# Altium PCB PCB_Arduino Poudell Spot welder V1.0.pcbdoc
Units mm, origin at the board's own origin, x right, y up, seen from the top; angles counter-clockwise.
Board outline 215.93 x 113.17 mm, 4 copper layers (Top Layer, Inner1, Inner2, Bottom Layer); 63 components, 44 nets, 190 pads, 147 vias.
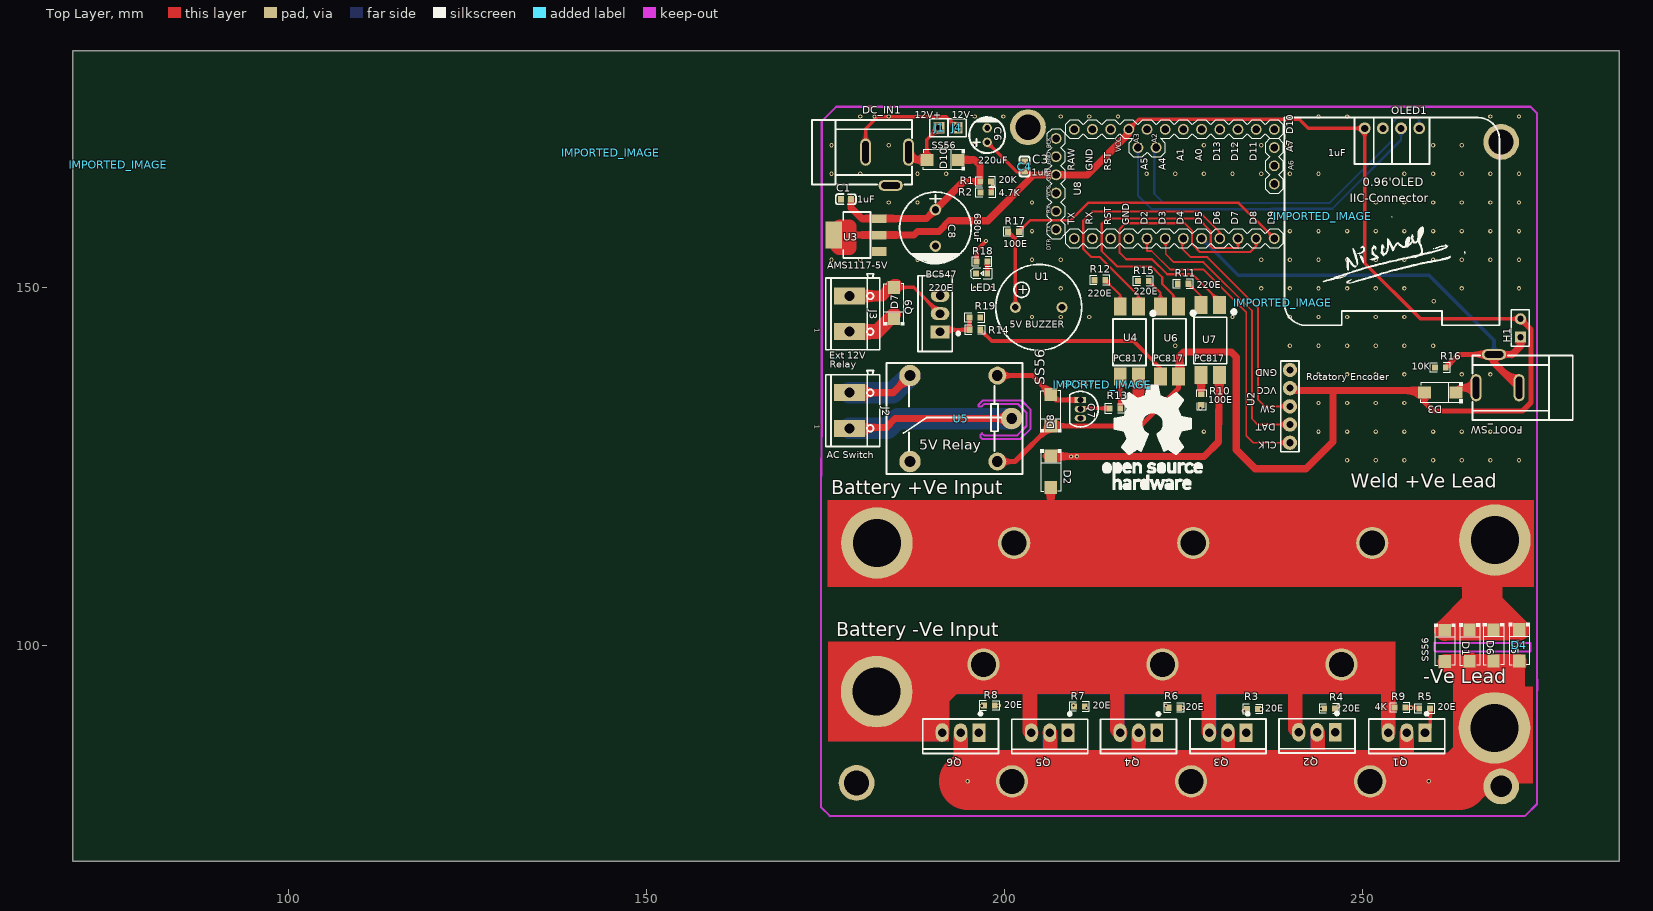
[diagram p0: Top Layer view]
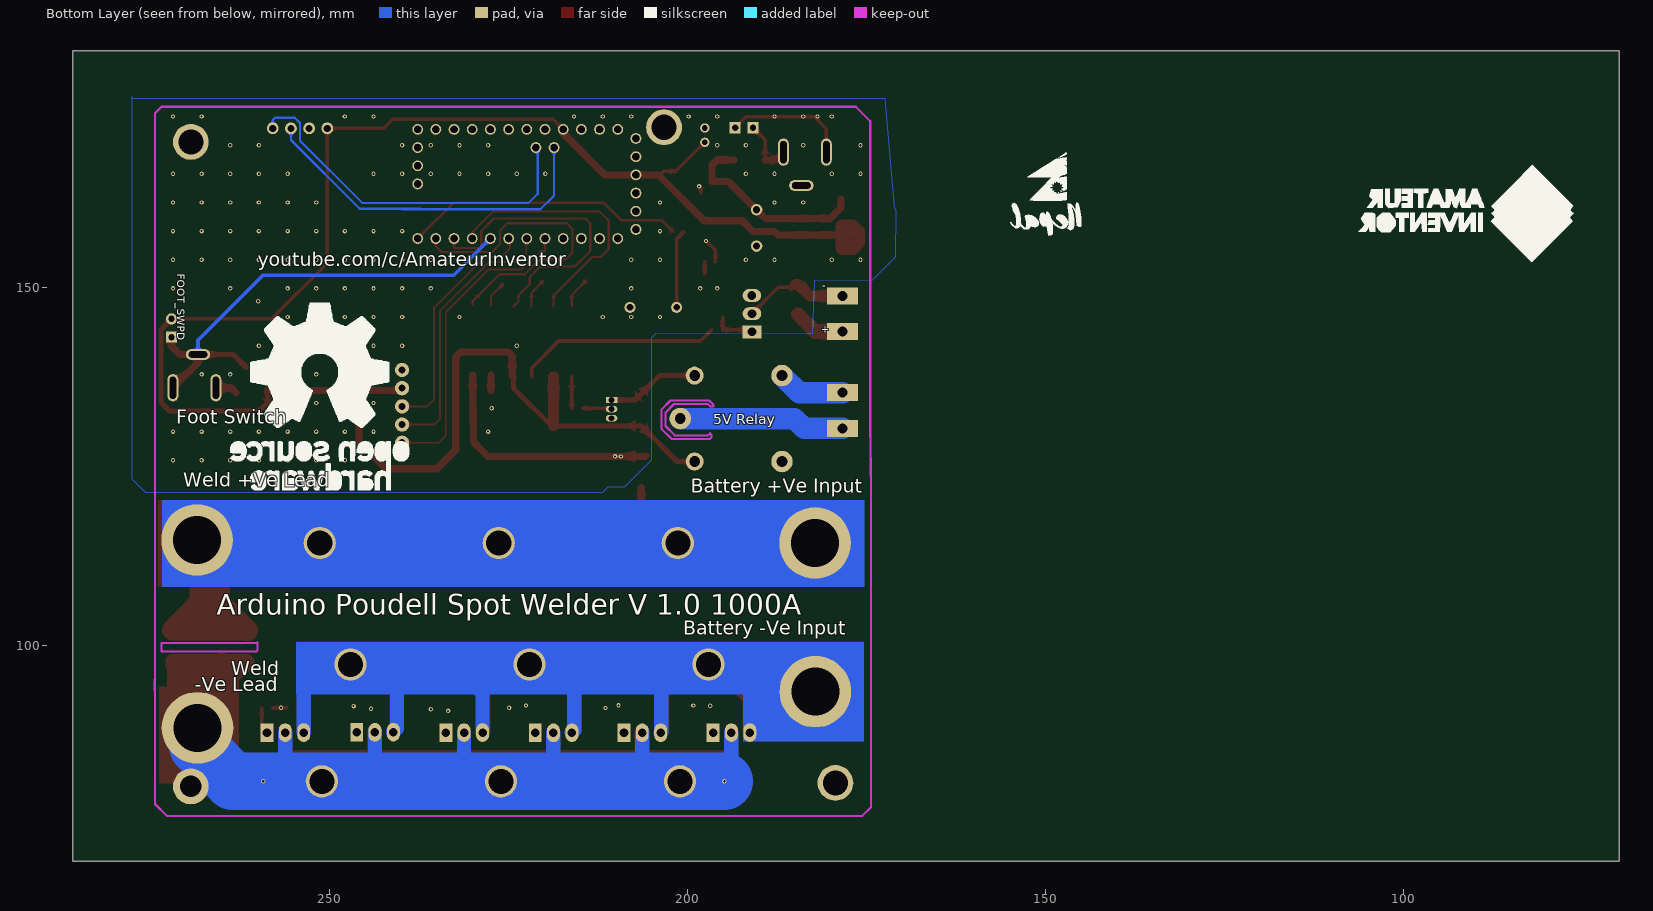
[diagram p1: Bottom Layer view, seen from below]
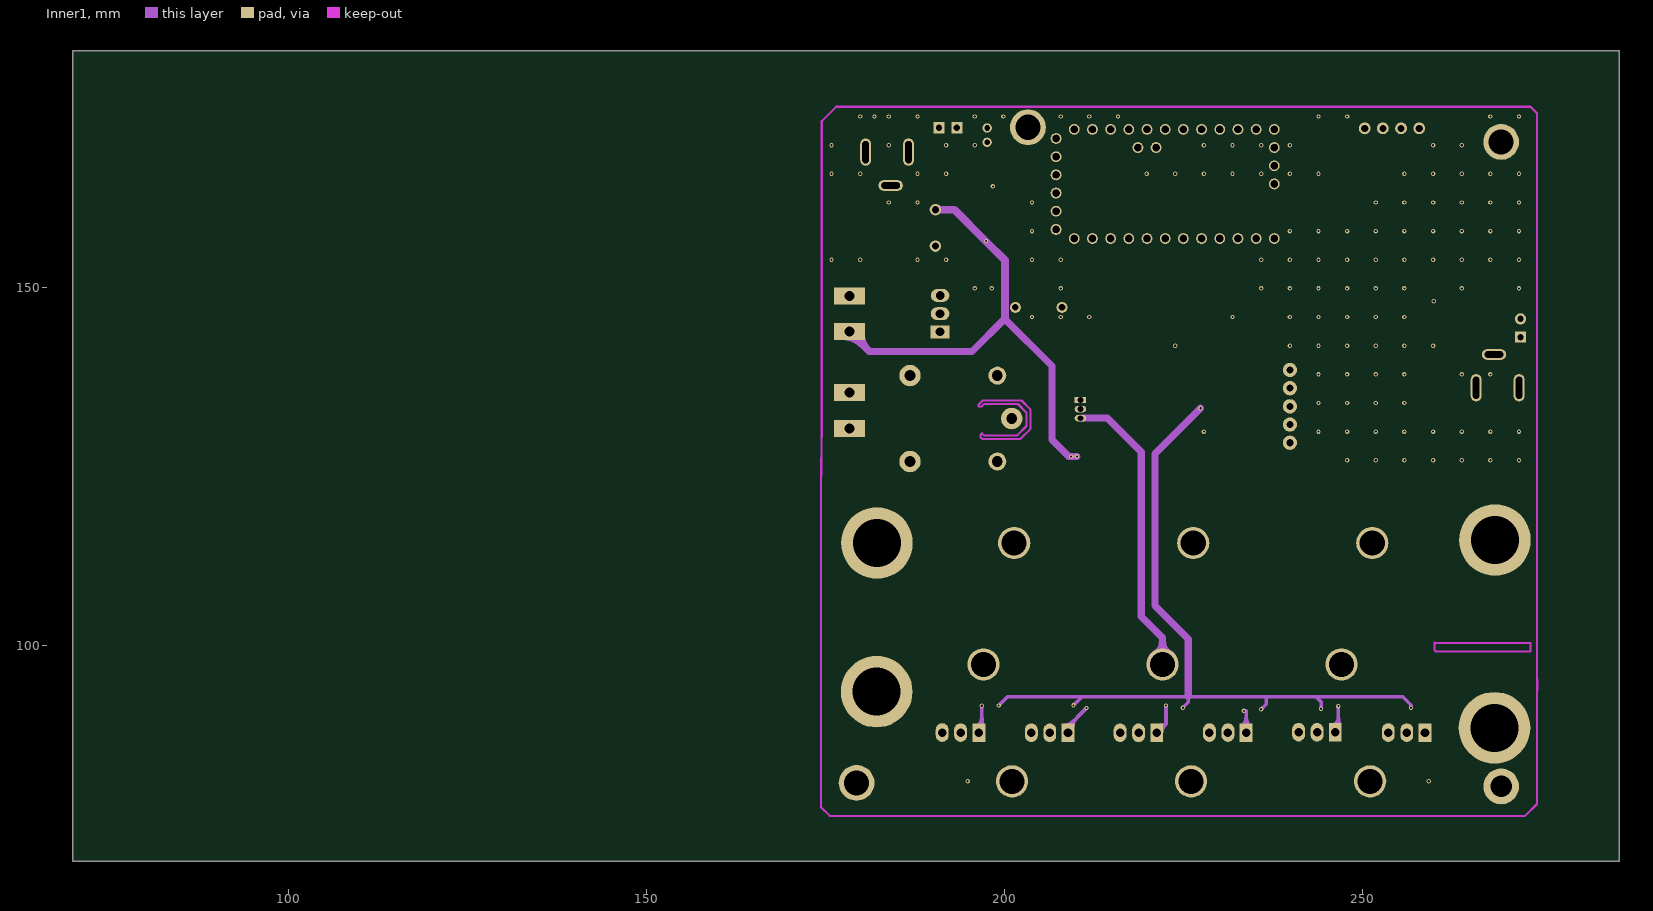
[diagram p2: Inner1]
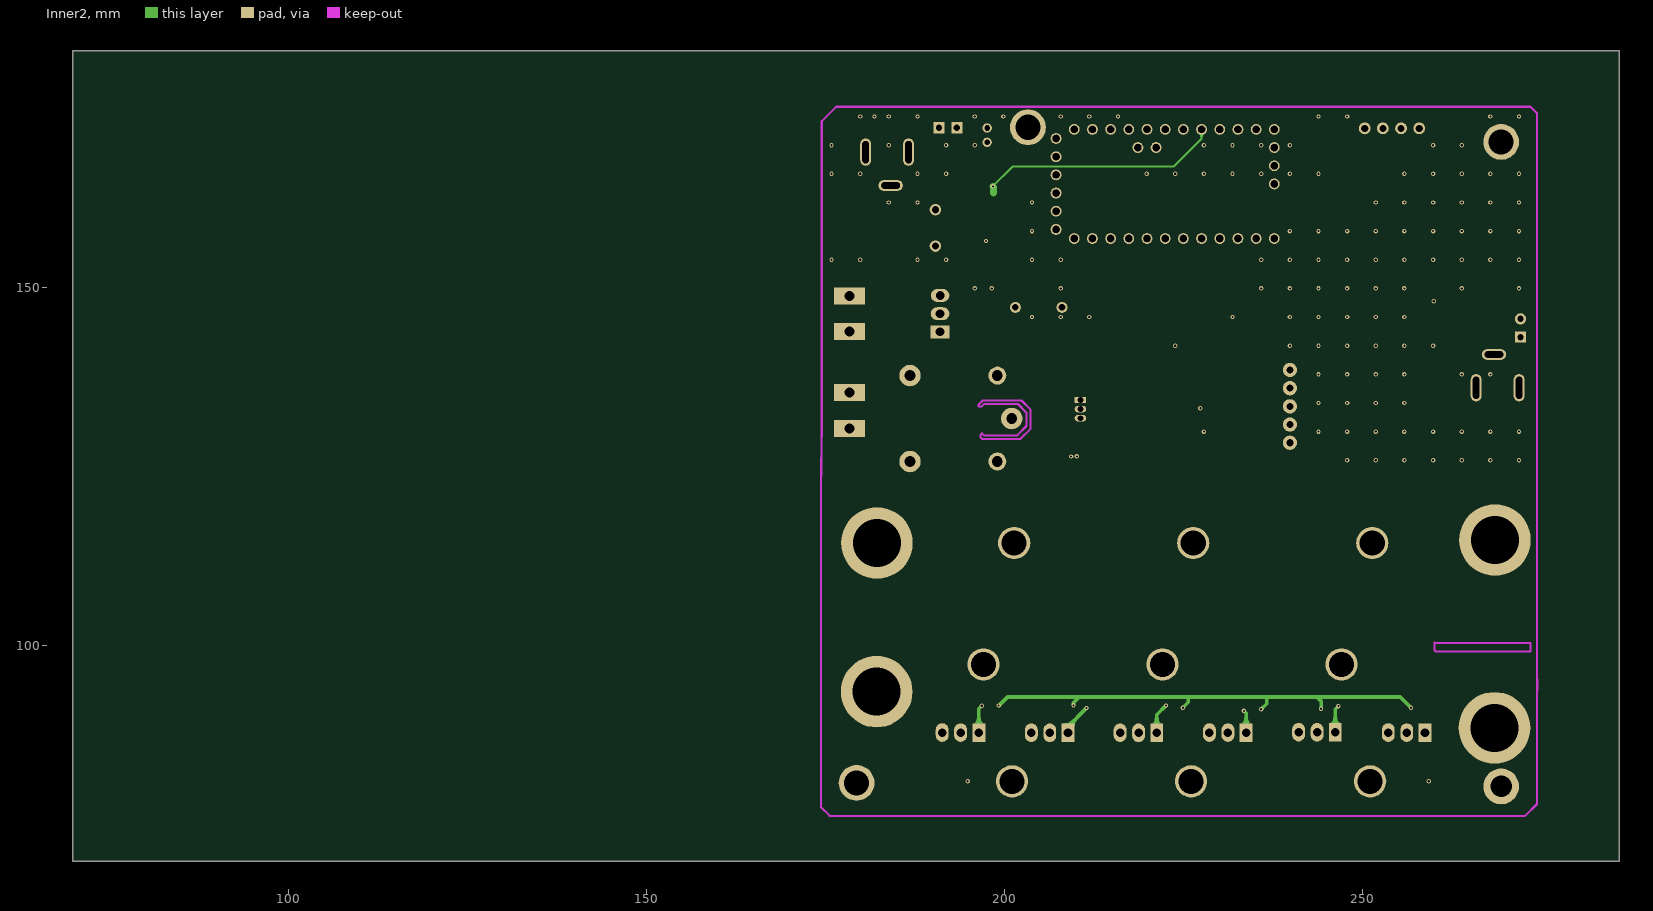
[diagram p3: Inner2]

## Layer stack, top to bottom
Top Layer: signal copper (thickness not stored)
Dielectric: dielectric 0.32, FR-4, Dk 4.8
Inner1: signal copper (thickness not stored)
Dielectric: dielectric 0.32, FR-4, Dk 4.8
Inner2: signal copper (thickness not stored)
Dielectric: dielectric 0.32, FR-4, Dk 4.8
Bottom Layer: signal copper (thickness not stored)

## Board outline
285.776,69.85 69.85,69.85 69.85,183.025 285.776,183.025

## Components (designator, comment, footprint, x,y, rotation, side; value= is the part's Value field where it differs from the comment)
C1 "1uF" footprint_bc1e 177.8,162.301 r0 top
C3 "1uF" footprint_bc1e 202.75,166.901 r270 top
C4 "1uF" footprint_bc1e 202.75,166.851 r270 top
C6 "10V 220uF" footprint_28fa 197.525,171.251 r90 top
C8 "35v 680uF" footprint_2c7b 190.3,158.301 r270 top
D1 "SS56" footprint_9b9f 261.425,99.926 r270 top
D2 "SS56" footprint_9b9f 206.4,124.251 r270 top
D3 "SS56" footprint_9b9f 260.8,135.301 r180 top
D4 "SS56" footprint_9b9f 271.825,100.026 r270 top
D5 "SS56" footprint_9b9f 268.225,100.001 r270 top
D6 "SS56" footprint_9b9f 264.9,99.976 r270 top
D7 "SS56" footprint_9b9f 184.5,147.801 r90 top
D8 "SS56" footprint_9b9f 206.4,132.851 r90 top
D10 "SS56" footprint_9b9f 191.3,167.801 r180 top
DC_IN1 "12.6V 2A" footprint_4f4c#1 183.549,166.551 r0 top
FOOT_SW "BarralJack" footprint_4f4c#2 268.8,138.301 r180 top
H1 "Foot_sw" footprint_42ee 271.998,144.325 r90 top
IMPORTED_IMAGE "IMPORTED_IMAGE" IMPORTED_IMAGE 76.2,167.084 r0 top
IMPORTED_IMAGE "IMPORTED_IMAGE" IMPORTED_IMAGE 144.953,168.803 r0 top
IMPORTED_IMAGE "IMPORTED_IMAGE" IMPORTED_IMAGE 244.388,159.899 r0 top
IMPORTED_IMAGE "IMPORTED_IMAGE" IMPORTED_IMAGE 238.8,147.828 r0 top
IMPORTED_IMAGE "IMPORTED_IMAGE" IMPORTED_IMAGE 213.625,136.376 r0 top
J1 "12V+" footprint_73cd 190.8,172.301 r0 top
J2 "EXT_AC" footprint_047e 178.3,132.801 r270 top
J3 "Ext Relay" footprint_047e 178.3,146.301 r270 top
J4 "12V-" footprint_73cd 193.3,172.301 r0 top
LED1 "Pwr_LED" footprint_213e 196.75,151.926 r0 top
OLED1 "0.96OLED_4P" footprint_7381 254.049,172.201 r0 top
Q1 "IRF540NPBF" footprint_fbe3 256.1,87.826 r180 top
Q2 "IRF540NPBF" footprint_fbe3 243.575,87.876 r180 top
Q3 "IRF540NPBF" footprint_fbe3 231.125,87.826 r180 top
Q4 "IRF540NPBF" footprint_fbe3 218.65,87.801 r180 top
Q5 "IRF540NPBF" footprint_fbe3 206.25,87.801 r180 top
Q6 "IRF540NPBF" footprint_fbe3 193.8,87.826 r180 top
Q7 "BC547B" footprint_6e3f 210.55,133.001 r270 top
Q9 "IRFZ44NPBF" footprint_beaa 190.95,146.326 r90 top
R1 "20k" footprint_e60d 197.299,164.8 r0 top
R2 "6.67k" footprint_e60d 197.35,163.226 r0 top
R3 "2E" footprint_e60d 234.574,91.1 r180 top
R4 "2E" footprint_e60d 245.326,91.201 r0 top
R5 "2E" footprint_e60d 258.625,91.201 r0 top
R6 "2E" footprint_e60d 223.599,91.3 r180 top
R7 "2E" footprint_e60d 210.408,91.476 r0 top
R8 "2E" footprint_e60d 197.825,91.6 r180 top
R9 "10k" footprint_e60d 255.173,91.351 r0 top
R10 "220E" footprint_e60d 227.424,134.325 r270 top
R11 "220E" footprint_e60d 224.899,150.5 r0 top
R12 "220E" footprint_e60d 213.274,151 r0 top
R13 "220E" footprint_e60d 215.35,133.101 r180 top
R14 "220E" footprint_e60d 195.8,144.076 r180 top
R15 "220E" footprint_e60d 219.324,150.901 r0 top
R16 "10k" footprint_e60d 260.799,138.801 r0 top
R17 "100E" footprint_e60d 201.201,157.775 r0 top
R18 "1K" footprint_e60d 196.8,153.601 r0 top
R19 "10k" footprint_e60d 195.8,145.801 r0 top
U1 "5V BUZZER" footprint_9d75 204.725,147.201 r0 top
U2 "Rotary Encoder" footprint_7133 239.8,128.301 r90 top
U3 "AMS1117-5.0_C498116" footprint_729b 179.3,157.301 r0 top
U4 "PC81713NIP1B" footprint_04e3 217.375,142.426 r180 top
U5 "5v" footprint_572f 193.85,131.676 r180 top
U6 "PC81713NIP1B" footprint_04e3 222.975,142.451 r180 top
U7 "PC81713NIP1B" footprint_04e3 228.675,142.651 r180 top
U8 "ARDUINO PRO MINI COPY" footprint_e3e4 218.575,160.626 r90 top

## Footprints (in the part's own frame and the unit in brackets; to place one, negate y for a bottom-side part, rotate by r counter-clockwise, add the part's x,y. Pads: shape width x height; smd on the part's side, far side on the other; paste and mask are expansions set on the pad)
footprint_2c7b [mm]
  round 1.6 hole 1: 1(-2.54,0) 2(2.54,0)
  silkscreen extent -5,-5 5.08,5
footprint_04e3 [mm]
  rect 1.8x2.5 smd: 1(-1.27,-4.9) 2(1.27,-4.9) 3(1.27,4.9) 4(-1.27,4.9)
  silkscreen extent -3.79,-4.42 2.29,3.32
footprint_4f4c#1 [mm]
  oval 1.5x3.8 hole 0.9 slot 3.1 at 90 deg copper offset 0.001,0: 1(2.999,2.325)
  oval 1.5x3.8 hole 0.9 slot 3.1 at 90 deg copper offset 0,0: 2(-3,2.325)
  oval 3.4x1.5 hole 0.9 slot 2.6 at 0 deg copper offset 0.001,0: 3(0.5,-2.326)
  silkscreen extent -10.5,-2.17 3.5,6.83
footprint_4f4c#2 [mm]
  oval 1.5x3.8 hole 0.9 slot 3.1 at 90 deg copper offset 0.001,0: 1(3.001,2.325)
  oval 1.5x3.8 hole 0.9 slot 3.1 at 90 deg copper offset 0,0: 2(-2.999,2.325)
  oval 3.4x1.5 hole 0.9 slot 2.6 at 0 deg copper offset 0.001,0: 3(0.5,-2.325)
  silkscreen extent -10.5,-2.17 3.5,6.83
footprint_6e3f [mm]
  rect 0.9x1.6 hole 0.8: 1(-1.27,0)
  oval 0.9x1.6 hole 0.8: 2(0,0) 3(1.27,0)
  silkscreen extent -2.48,-1.5 2.48,2.48
footprint_9b9f [mm]
  rect 1.8x1.7 smd: 1(-2.192,0) 2(2.192,0)
  silkscreen extent -3.11,-1.48 2.73,1.48
footprint_9d75 [mil]
  round 60 hole 36: 1(-127.95,-0.01)
  round 60 hole 36 copper offset -0.01,0.01: 2(127.97,-0.01)
  silkscreen extent -236,-236 236,236
footprint_28fa [mm]
  round 1.3 hole 0.8: 1(-1,0) 2(1,0)
  silkscreen extent -2.5,-2.5 2.5,2.5
footprint_42ee [mil]
  rect 62x62 hole 35: 1(-50,0)
  round 62 hole 35: 2(50,0)
  silkscreen extent -100,-49 100,50
footprint_047e [mm]
  rect 2.38x4.285 hole 1.402: 1(2.489,0) 2(-2.489,0)
  silkscreen extent -5.59,-3.3 5,4.22
footprint_73cd [mil]
  rect 62x62 hole 35: 1(0.01,0)
  silkscreen extent -50,-50 50,50
footprint_213e [mm]
  rect 0.8x0.8 smd: 1(-0.799,-0.003) 2(0.799,0.003)
  silkscreen extent -1.49,-0.75 1.39,0.76
footprint_572f [mm]
  round 3 hole 1.5: 1(-7.1,0) 3(7.1,-6) 4(7.1,6)
  round 2.5 hole 1.5: 2(-5.1,-6) 5(-5.1,6)
  silkscreen extent -8.6,-7.75 10.4,7.75
footprint_729b [mm]
  rect 2x1.2 smd: 1(3.175,-2.3) 2(3.175,0) 3(3.175,2.3)
  rect 2.3x3.8 smd: 4(-3.175,0)
  silkscreen extent -1.87,-3.2 1.93,3.2
footprint_7133 [mm]
  round 2 hole 1: 1(0,0) 2(2.54,0) 3(5.08,0) 4(7.62,0) 5(10.16,0)
  silkscreen extent -1.27,-1.27 11.43,1.27
footprint_7381 [mm]
  round 1.65 hole 1 copper offset 0,0: 1(-3.81,-0.002) 2(-1.27,0.001) 3(1.27,0.001) 4(3.81,0.001)
  silkscreen extent -15,-27.5 15,1.5
footprint_bc1e [mm]
  rect 0.8x0.9 smd: 1(-0.7,0) 2(0.7,0)
  silkscreen extent -1.41,-0.71 1.39,0.72
footprint_beaa [mm]
  rect 1.8x2.6 hole 1.2: 1(-2.54,0.005)
  oval 1.8x2.6 hole 1.2: 2(0,0.005)
  oval 1.8x2.6 hole 1.2 copper offset 0,0: 3(2.54,-0.005)
  silkscreen extent -5.3,-2.73 5.3,3.09
footprint_e3e4 [mm]
  round 1.508 hole 1: A0(11.43,-8.89) A1(11.43,-6.35) A2(11.43,-3.81) A3(11.43,-1.27) A4(8.89,-2.54) A5(8.89,0) A6(6.35,-19.05) A7(8.89,-19.05) BLK(10.16,11.43) D2(-3.81,-1.27) D3(-3.81,-3.81) D4(-3.81,-6.35) D5(-3.81,-8.89) D6(-3.81,-11.43) D7(-3.81,-13.97) D8(-3.81,-16.51) D9(-3.81,-19.05) D10(11.43,-19.05) D11(11.43,-16.51) D12(11.43,-13.97) D13(11.43,-11.43) DTR(-2.54,11.43) GND(-3.81,1.27) GND@1(11.43,6.35) GND@2(7.62,11.43) GND@3(3.81,-19.05) RAW(11.43,8.89) RST(11.43,3.81) RST@1(-3.81,3.81) RX(-3.81,6.35) RX@1(2.54,11.43) TX(-3.81,8.89) TX@1(0,11.43) VCC(11.43,1.27) VCC@1(5.08,11.43)
  silkscreen extent -5.08,-20.32 12.7,12.7
footprint_e60d [mm]
  rect 0.806x0.864 smd: 1(-0.753,0) 2(0.753,0)
  silkscreen extent -1.39,-0.66 1.39,0.66
footprint_fbe3 [mm]
  rect 1.8x2.6 hole 1.2: 1(-2.56,0.005)
  oval 1.8x2.6 hole 1.2: 2(-0.02,0.005)
  oval 1.8x2.6 hole 1.2 copper offset 0,0: 3(2.56,-0.005)
  silkscreen extent -5.32,-2.82 5.28,2.9
IMPORTED_IMAGE [mm]

## Free pads (board coordinates)
  round 5 hole 3.5 copper offset 0,0.001: 1(179.3,80.8)
  round 10 hole 6.7: 1(182.099,93.536) 1(182.125,114.3) 1(268.425,114.701)
  round 4.5 hole 3.5 copper offset 0,0: 1(197.013,97.346) 1(201.3,114.3)
  round 4.5 hole 3.5 copper offset 0,0.001: 1(201.005,81.025) 1(222.013,97.346) 1(226.3,114.299)
  round 5 hole 3.5 copper offset -0.001,0.001: 1(203.225,172.35) 1(269.3,170.3)
  round 4.5 hole 3.5 copper offset 0,0.002: 1(226.005,81.024) 1(247.013,97.345) 1(251.3,114.299)
  round 4.5 hole 3.5 copper offset -0.001,0.002: 1(251.006,81.024)
  round 10 hole 6.7 copper offset 0,0.001: 1(268.375,88.5)
  round 5 hole 3.002 unplated copper offset -0.001,0.001: 1(269.3,80.3)

## Via types
v1: diameter 0.61, hole 0.305, Top Layer to Bottom Layer, 147 vias

## Nets (pads, with @x,y where several pads share a name; then routed paths per layer and width w, separated by ;. In a path a pad name is that pad's centre, name@x,y a point inside that pad or via, vN(x,y) a via of type N, cw(c..) or ccw(c..) an arc to the next point about the centre after c; other vN are vias at no path point)
12V+: C1.2 C8.1 D2.1 D7.1 D10.1 J3.1 R1.1 R18.1 U3.3 U7.4 | length 162.9
  Top Layer w0.5: R18.1 196.046,155.162 v1(197.354,156.47)
  Top Layer w1: C1.2 178.5,161.101 180,159.601 U3.3 189.06,159.601 C8.1 194.26,164.801 R1.1 196.546,167.054 195.8,167.801 D10.1 ; D2.1@205.77,126.443 205.82,126.393 v1(210.05,126.393) 227.817,126.393 229.85,128.426 U7.4
  Top Layer w2: J3.1 182.118,143.811 D7.1@184.507,146.2
  Inner1 w1: J3.1 181.061,141.051 195.425,141.051 199.974,145.6 199.974,153.777 192.91,160.84 C8.1 192.984,160.84 v1(197.354,156.47) 200.05,153.774 200.05,145.524 206.576,138.999 206.576,128.725 208.907,126.393 v1@210.049,126.393
  other v1: 209.25,126.376
12345: pad.1@179.3,80.8
13245: pad.1@269.3,170.3
123457: pad.1@203.225,172.35
+5V: C3.2 C4.2 C6.1 D3.2 D8.1 H1.2 OLED1.1 U2.4 U3.2 U3.4 U4.4 U5.5 U6.4 U8.VCC U8.VCC@1 | length 277.6
  Top Layer w0.5: C6.1 201.574,166.2 C3.2 ; C3.2 203.24,166.201 203.87,165.57 ; U8.VCC 218.699,173.452 241.125,173.452 242.377,172.199 OLED1.1 ; OLED1.1@250.241,172.199 250.241,153.386 258.031,145.595 H1.2@272.001,145.595
  Top Layer w0.7: U5.5 201.417,125.676 D8.1 218.982,130.658 224.245,135.921 U6.4 ; U4.4 U4.4@218.742,137.428 ; D3.2 258.607,133.894 259.776,132.725 272.275,132.725 273.474,133.927 273.474,144.12 H1.2@272.001,145.595
  Top Layer w1: U3.4 U3.2 187.3,157.301 187.8,157.801 190.8,157.801 192.3,159.301 197.6,159.301 203.995,165.696 207.135,165.696 211.495,165.696 217.305,171.506 U8.VCC ; U6.4 224.425,137.731 224.425,140.426 224.975,140.976 231.6,140.976 232.3,140.276 232.3,127.326 234.95,124.676 242.05,124.676 245.801,128.427 245.801,135.575 ; U2.4 240.144,135.575 258.607,135.575 D3.2
  Top Layer w1.5: 218.645,130.676 U4.4
  Top Layer w2: U3.4@176.126,156.251 176.85,155.527 178.3,155.526 178.275,155.849 178.275,158.501 176.924,158.501 176.126,157.701 176.126,157.3 U3.4@176.126,156.251
BUZZER: R17.2 U8.D9 | length 39.4
  Top Layer w0.35: R17.2@201.953,157.775 203.578,159.4 209.225,159.4 211.625,161.801 232.64,161.801 U8.D9
CLK: U2.1 U8.D2 | length 42.9
  Top Layer w0.25: U8.D2@219.834,156.807 219.834,156.816 U8.D2 219.845,155.075 220.474,155.075 223.05,152.502 227.724,152.502 233.7,146.525 233.7,129.276 234.676,128.3 U2.1
DAT: U2.2 U8.D3 | length 38.2
  Top Layer w0.25: U8.D3 222.476,156.724 222.476,154.65 223.599,153.525 227.724,153.525 234.5,146.751 234.5,131.676 235.333,130.84 U2.2
DC_IN1_1: D10.2 DC_IN1.1 J1.1 | length 8.2
  Top Layer w0.5: D10.2 189.107,170.608 J1.1
  Top Layer w1: DC_IN1.1 187.624,167.801 D10.2
DRAIN: D1.2 D4.2 D5.2 D6.2 pad.1@201.005,81.025 pad.1@226.005,81.024 pad.1@251.006,81.024 pad.1@268.375,88.5 pad.1@269.3,80.3 Q1.2 Q2.2 Q3.2 Q4.2 Q5.2 Q6.2 | length 329.7
  Top Layer w0.254: 262.7,79.851 268.85,79.851 pad.1@269.3,80.301
  Top Layer w2: 193.82,83.401 193.82,84.379 ; Q6.2 193.82,84.379 ; 206.075,82.151 206.321,82.151 ; Q5.2@206.27,87.796 206.321,87.744 206.321,84.379 ; 206.321,81.326 206.321,82.151 ; 218.645,81.326 218.657,84.379 ; Q4.2 218.657,84.379 ; Q3.2 231.155,84.379 ; Q2.2 243.669,87.797 243.669,84.379 ; 243.669,81.326 243.669,84.379 ; 256.12,81.051 256.12,84.76 ; Q1.2 256.12,84.76 ; D1.2 261.475,97.783 D6.2 D5.2 D4.2 ; D1.2 266.84,92.319 D4.2@271.826,97.307 ; 193.82,84.379 206.321,84.379 ; 206.321,82.151 206.321,84.379 ; 206.321,84.379 218.657,84.379 ; 218.657,84.379 231.155,84.379 ; 231.155,84.379 243.669,84.379 ; 243.669,84.379 255.738,84.379 256.12,84.76
  Top Layer w2.5: 265,93.844 D6.2@265,97.726
  Top Layer w8: v1(194.8,81.025) 201.004,81.026 226.004,81.026 251.005,81.026 v1(259.185,81.025) ; v1@259.184,81.051 263.449,81.051 268.375,85.977 pad.1@268.375,88.501
  Bottom Layer w2: 193.82,81.025 Q6.2 ; 206.27,81.025 Q5.2@206.27,87.796 ; 218.67,81.025 Q4.2 ; 231.145,81.025 Q3.2 ; 243.595,81.025 Q2.2 ; 256.12,81.025 Q1.2
  Bottom Layer w8: v1(194.8,81.025) v1(259.185,81.025) ; v1@259.184,81.051 263.449,81.051 268.375,85.977 pad.1@268.375,88.501
FOOT_SW_1: D3.1 FOOT_SW.1 | length 3.1
  Top Layer w1: D3.1 263.667,135.975 FOOT_SW.1@265.8,135.975
FOOTSW: FOOT_SW.2 FOOT_SW.3 H1.1 R16.2 U8.D5 | length 67.8
  Top Layer w0.7: R16.2 263.378,140.626 FOOT_SW.3@268.299,140.626
  Top Layer w1: FOOT_SW.3@268.299,140.626 268.299,139.476 FOOT_SW.2 ; FOOT_SW.3@268.3,140.627 270.85,140.627 272.001,141.775 H1.1@272.001,143.055
  Bottom Layer w0.5: U8.D5 227.486,156.816 232.6,151.702 259.225,151.702 268.3,142.626 FOOT_SW.3@268.3,140.627
GND: C1.1 C3.1 C4.1 C6.2 C8.2 DC_IN1.2 J4.1 LED1.1 OLED1.2 pad.1@182.099,93.536 pad.1@197.013,97.346 pad.1@222.013,97.346 pad.1@247.013,97.345 Q1.3 Q2.3 Q3.3 Q4.3 Q5.3 Q6.3 Q7.3 Q9.3 R2.1 R9.1 R11.1 R12.1 R15.1 R16.1 R19.2 U1.2 U2.5 U3.1 U8.A1 U8.A2 U8.A3 U8.A6 U8.A7 U8.D10 U8.D11 U8.D12 U8.D13 U8.GND U8.GND@2 | length 205.1
  Top Layer w0.5: DC_IN1.2 180.549,172.15 182.2,173.801 191.8,173.801 J4.1 ; Q1.3 253.539,90.469 R9.1@254.422,91.351
  Top Layer w2: Q6.3 191.239,92.616 194.249,95.626 251.523,95.626 253.54,93.609 Q1.3 ; 203.46,95.626 203.46,88.035 Q5.3 ; 215.69,95.626 215.69,88.206 Q4.3@216.09,87.806 ; 228.45,95.539 228.45,87.946 Q3.3 ; 240.525,95.626 240.525,88.37 Q2.3@241.015,87.881
  Inner1 w1: Q7.3@210.551,131.732 214.345,131.732 219.049,127.025 219.049,104.026 222.014,101.062 pad.1@222.014,97.348
  Bottom Layer w2: 203.6,94.876 203.6,87.896 Q5.3 ; 215.75,94.151 215.75,88.146 Q4.3@216.09,87.806 ; Q3.3 228.565,93.341 229.25,94.026 ; 240.5,95.026 240.5,88.395 Q2.3@241.014,87.881 ; 252.925,96.151 253.539,95.536 Q1.3
  other v1: 247.791,125.85 251.791,125.85 255.791,125.85 259.791,125.85 263.791,125.85 267.791,125.85 271.791,125.85 227.791,129.85 243.791,129.85 247.791,129.85 251.791,129.85 255.791,129.85 259.791,129.85 263.791,129.85 267.791,129.85 271.791,129.85 243.791,133.85 247.791,133.85 251.791,133.85 255.791,133.85 243.791,137.85 247.791,137.85 251.791,137.85 255.791,137.85 263.791,137.85 267.791,137.85 223.791,141.85 239.791,141.85 243.791,141.85 247.791,141.85 251.791,141.85 255.791,141.85 259.791,141.85 203.791,145.85 207.791,145.85 211.791,145.85 231.791,145.85 239.791,145.85 243.791,145.85 247.791,145.85 251.791,145.85 255.791,145.85 259.875,148.051 195.791,149.85 198.175,149.851 207.791,149.85 235.791,149.85 239.791,149.85 243.791,149.85 247.791,149.85 251.791,149.85 255.791,149.85 263.791,149.85 271.791,149.85 175.791,153.85 179.791,153.85 187.791,153.85 191.791,153.85 203.791,153.85 207.791,153.85 235.791,153.85 239.791,153.85 243.791,153.85 247.791,153.85 251.791,153.85 255.791,153.85 259.791,153.85 263.791,153.85 267.791,153.85 271.791,153.85 203.791,157.85 239.791,157.85 243.791,157.85 247.791,157.85 251.791,157.85 255.791,157.85 259.791,157.85 263.791,157.85 267.791,157.85 271.791,157.85 183.791,161.85 187.791,161.85 203.791,161.85 251.791,161.85 255.791,161.85 259.791,161.85 263.791,161.85 267.791,161.85 271.791,161.85 175.791,165.85 179.791,165.85 187.791,165.85 191.791,165.85 219.791,165.85 223.791,165.85 227.791,165.85 231.791,165.85 235.791,165.85 239.791,165.85 243.791,165.85 255.791,165.85 259.791,165.85 263.791,165.85 267.791,165.85 271.791,165.85 175.791,169.85 183.791,169.85 191.791,169.85 195.791,169.85 227.791,169.85 231.791,169.85 235.791,169.85 239.791,169.85 259.791,169.85 263.791,169.85 179.791,173.85 181.791,173.85 183.791,173.85 187.791,173.85 195.791,173.85 199.791,173.85 207.791,173.85 211.791,173.85 215.791,173.85 243.791,173.85 247.791,173.85 267.791,173.85 271.791,173.85
J3_2: D7.2 J3.2 Q9.2 | length 15.2
  Top Layer w0.5: D7.2 187.277,149.993 Q9.2
  Top Layer w1.5: J3.2 182.89,148.791 184.5,150.401 D7.2@184.85,150.401
LED1_2: LED1.2 R18.2 | length 1.7
  Top Layer w0.5: LED1.2 197.553,151.933 R18.2
MOSFET: U7.1 U8.D8 | length 44.1
  Top Layer w0.3: U7.1 229.944,148.082 226.2,151.826 222.649,151.826 220.551,153.927 216.924,153.927 216.024,154.826 216.024,158.151 216.824,158.951 225.1,158.951 226.149,157.902 226.149,156.002 227.226,154.925 234.249,154.925 235.085,155.761 U8.D8
Q1_1: Q1.1 R5.2 | length 3.7
  Top Layer w0.5: Q1.1 259.378,88.539 R5.2@259.378,91.201
Q2_1: Q2.1 R4.2 | length 7.7
  Inner1 w0.5: Q2.1 246.575,88.311 v1(246.575,91.526)
  Inner2 w0.5: Q2.1 246.135,91.086 v1(246.575,91.526)
Q3_1: Q3.1 R3.2 | length 6.2
  Inner1 w0.5: Q3.1 233.7,90.902
  Inner2 w0.5: v1(233.375,90.851) 233.685,90.541 Q3.1
Q4_1: Q4.1 R6.2 | length 8.7
  Inner1 w0.5: Q4.1 222.5,89.086 v1(222.5,91.601)
  Inner2 w0.5: Q4.1 221.21,90.311 v1(222.5,91.601)
Q5_1: Q5.1 R7.2 | length 9.1
  Inner1 w0.5: Q5.1@208.811,87.795 208.811,88.661 v1@211.399,91.249
  Inner2 w0.5: Q5.1@208.81,87.796 208.81,88.661 v1(211.4,91.251)
Q6_1: Q6.1 R8.2 | length 7.9
  Inner1 w0.5: Q6.1 196.775,88.236 v1(196.775,91.576)
  Inner2 w0.5: Q6.1 196.36,91.161 v1(196.775,91.576)
Q7_1: D8.2 Q7.1 U5.2 | length 17.5
  Top Layer w0.7: U5.2 203.876,137.676 207.279,134.272 Q7.1@210.551,134.272 ; D8.2 207.172,134.271 Q7.1@210.55,134.271
Q7_2: Q7.2 R13.2 | length 4.1
  Top Layer w0.5: Q7.2 210.65,133.101 R13.2
R3_1: R3.1 R4.1 R5.1 R6.1 R7.1 R8.1 R9.2 R10.2 | length 182.1
  Top Layer w0.5: R9.2 255.978,91.301 v1(256.7,91.3) 257.771,91.301 R5.1
  Inner1 w0.5: v1(199.125,91.601) 200.375,92.85 243.449,92.85 ; v1(209.575,91.626) 210.799,92.85 211.93,92.85 ; v1@224.85,91.301 225.595,92.047 225.595,92.85 ; v1(235.775,91.076) 236.475,91.776 236.475,92.85 ; v1(244.15,91.151) 244.15,92.151 243.449,92.85 ; 255.575,92.851 243.449,92.85 ; 255.625,92.765 256.75,91.64 ; v1(256.7,91.3) 256.7,91.726
  Inner1 w1: 225.595,92.85 225.595,100.904 220.949,105.55 220.949,126.776 v1(227.3,133.126)
  Inner2 w0.5: v1(199.125,91.601) 199.175,91.601 200.375,92.801 255.2,92.801 v1(256.7,91.3) ; v1(209.575,91.626) 209.575,91.976 210.401,92.801 211.94,92.801 ; v1@224.85,91.301 225.6,92.052 225.6,92.801 ; v1(235.775,91.076) 236.55,91.851 236.55,92.551 236.486,92.614 236.486,92.801 ; 243.58,92.801 244.15,92.231 v1(244.15,91.151)
  other v1: 224.85,91.301 256.7,91.301
R10_1: R10.1 U7.3 | length 2.1
  Top Layer w1: 227.405,135.626 U7.3
R14_1: R14.1 U6.3 | length 28.5
  Top Layer w0.5: R14.1 198.15,142.502 217.957,142.502 221.704,138.745 U6.3
R14_2: Q9.1 R14.2 R19.1 | length 5.9
  Top Layer w0.5: Q9.1 191.235,144.076 R14.2 R19.1
R15_2: R15.2 U6.2 | length 4.2
  Top Layer w0.3: R15.2 221.705,149.274 U6.2
RELAY1: U4.1 U8.D6 | length 37.5
  Top Layer w0.3: U4.1 218.646,148.806 213.225,154.226 212.075,154.226 210.949,155.351 210.949,159.301 212.25,160.602 227.076,160.602 230.005,157.673 U8.D6
RELAY2: U6.1 U8.D7 | length 42.4
  Top Layer w0.3: U6.1 223.525,148.072 223.525,148.925 221.976,150.475 221.976,151.425 220.474,152.926 215.651,152.926 213.525,155.052 213.525,158.9 214.224,159.601 227,159.601 228.75,157.851 228.75,155.75 229.024,155.476 232.545,155.476 U8.D7
SCL: OLED1.3 U8.A5 | length 52.4
  Bottom Layer w0.3: U8.A5 218.575,162.827 220.5,160.901 239.824,160.901 ; 237.226,160.975 245.725,160.975 255.321,170.571 OLED1.3@255.321,172.202
SDA: OLED1.4 U8.A4 | length 51.7
  Bottom Layer w0.3: U8.A4 220.85,169.25 220.85,163.076 222.125,161.801 245.374,161.801 254.051,170.475 254.051,172.951 254.775,173.675 257.548,173.675 257.858,173.368 OLED1.4
SW: U2.3 U8.D4 | length 33.1
  Top Layer w0.25: U8.D4 224.775,156.665 224.775,155.377 225.925,154.226 228.275,154.226 235.326,147.175 235.326,134.351 236.294,133.38 U2.3
U1_1: R17.1 U1.1 | length 11
  Top Layer w0.5: R17.1 201.475,156.747 U1.1
U4_2: R12.2 U4.2 | length 4.5
  Top Layer w0.3: R12.2 216.105,148.924 U4.2
U4_3: R13.1 U4.3 | length 4.4
  Top Layer w0.5: R13.1 U4.3
U5_1: J2.1 U5.1 | length 46.4
  Top Layer w1: J2.1 178.439,130.451 183.45,130.451 184.675,131.676 U5.1
  Bottom Layer w3: J2.1 183.66,130.312 185.023,131.676 U5.1
U5_3: J2.2 U5.3 | length 18.9
  Top Layer w1: J2.2 184.364,135.29 U5.3
  Bottom Layer w3: J2.2 184.364,135.29 U5.3
U5_4: U5.4
U7_2: R11.2 U7.2 | length 3.7
  Top Layer w0.3: R11.2 227.405,148.749 U7.2
VCC: D1.1 D2.2 D4.1 D5.1 D6.1 pad.1@182.125,114.3 pad.1@201.3,114.3 pad.1@226.3,114.299 pad.1@251.3,114.299 pad.1@268.425,114.701 | length 33.7
  Top Layer w1: D2.2 206.4,118.876 206.775,118.501
  Top Layer w3: pad.1@265.325,111.201 265.325,106.018 D1.1@261.525,102.218 ; 267.975,109.451 267.975,106.068 D4.1 D5.1@268.225,102.218 ; D5.1 D5.1@268.225,102.218 ; D1.1@261.525,102.218 D1.1 D1.1@261.525,102.218 ; D1.1@261.525,102.218 D5.1@268.225,102.218
VREF: R1.2 R2.2 U8.A0 | length 35.1
  Top Layer w0.5: R2.2 198.103,163.879 v1(198.325,164.101)
  Inner2 w0.3: v1(198.325,164.101) 201.074,166.85 223.55,166.85 227.465,170.767 U8.A0
  Inner2 w1: v1(198.325,164.101) 198.425,164.001 198.425,163.201
"": DC_IN1.3 U8.BLK U8.DTR U8.GND@1 U8.GND@3 U8.RAW U8.RST U8.RST@1 U8.RX U8.RX@1 U8.TX U8.TX@1

## Polygon pours and split planes (outlines as drawn)
GND on Bottom Layer (solid, remove dead copper, pour order 0): 172.3,176.363 277.325,176.363 277.575,176.613 277.575,123.288 275.675,121.388 211.775,121.388 211.025,122.138 208.725,122.138 204.925,125.938 204.925,142.988 204.3,143.613 182.475,143.488 182.2,150.963 174.075,151.088 170.9,154.263 170.775,160.763 171.025,161.013
GND on Top Layer (solid, remove dead copper, pour order 1): 172.35,176.425 277.375,176.425 277.625,176.675 277.625,123.35 275.725,121.45 211.825,121.45 211.075,122.2 208.775,122.2 204.975,126 204.975,143.05 204.35,143.675 182.525,143.55 182.25,151.025 174.125,151.15 170.95,154.325 170.825,160.825 171.075,161.075

## Keep-outs
Board Outline Layer:
  lines w0.3 net "": 196.75,133.374 196.775,133.374 ; 259.975,100.35 259.975,99.35 260.175,99.149 273.325,99.149 273.401,99.149 273.401,100.35 260.025,100.376 259.975,100.376 ; 274.3,95.301 274.3,173.215 274.3,173.302 ; 274.3,96.302 274.3,77.851 272.649,76.2 175.524,76.2 174.3,77.427 174.3,106.302 174.3,120.8 174.427,131.714 174.427,173.182 176.459,175.214 273.385,175.214 274.3,174.3 ; 274.35,93.715 274.35,95.215 ; 196.775,133.374 196.325,133.374 196.325,133.6 196.925,134.2 202.325,134.2 203.6,132.925 203.6,130.276 202.15,128.825 196.849,128.825 196.6,129.074 196.6,129.399 196.826,129.625 196.826,129.575 197.075,129.326 201.725,129.326 203.026,130.626 203.026,132.501 201.824,133.7 200.374,133.7 197.103,133.7 196.775,133.374 ; 274.3,173.302 274.3,174.3 ; 274.3,173.302 274.3,174.3 ; 274.3,174.3 274.3,174.3

## Other copper
Top Layer:
  drawing of 121 lines, arcs and shapes, not listed
Inner1:
  region net GND: 222.514,100.41 221.514,100.41 221.511,100.309 221.503,100.215 221.493,100.145 221.48,100.08 221.464,100.018 221.445,99.96 221.423,99.906 221.399,99.854 221.372,99.806 221.343,99.76 221.311,99.716 221.277,99.674 221.232,99.624 221.173,99.566 221.089,99.492 220.8,99.269 220.615,99.119 220.492,99.008 220.381,98.896 220.325,98.835 223.7,98.835 223.603,98.94 223.493,99.047 223.357,99.164 223.029,99.42 222.906,99.52 222.834,99.585 222.786,99.634 222.741,99.684 222.708,99.727 222.677,99.771 222.648,99.818 222.622,99.867 222.598,99.92 222.577,99.975 222.559,100.034 222.544,100.096 222.531,100.163 222.522,100.233 222.515,100.328
  region net 12V+: 179.845,141.561 181.259,141.561 cw(c183.235,143.537) 180.442,143.438 177.723,142.621 cw(c177.193,138.909)
  region net Q2_1: 246.825,89.921 246.325,89.921 cw(c245.387,89.921) 245.95,89.171 246.877,89.171 cw(c252.184,89.921)
  region net Q3_1: 233.945,89.871 233.445,89.871 cw(c232.504,89.875) 233.066,89.121 234.316,89.121 cw(c234.879,89.866)
  region net Q4_1: 222.64,88.872 222.323,89.263 cw(c221.838,89.747) 221.626,89.096 222.11,87.812 cw(c223.966,87.547)
  region net Q5_1: 210.129,89.626 209.422,89.626 cw(c208.081,90.967) 208.389,89.096 209.71,88.676 cw(c211.146,88.609)
  region net Q6_1: 197.025,89.871 196.525,89.871 cw(c195.587,89.871) 196.15,89.121 197.077,89.121 cw(c202.384,89.871)
  region net 12V+: 191.389,160.34 191.389,161.34 191.194,161.334 191.123,161.334 191.071,161.337 191.037,161.341 191.004,161.348 190.972,161.357 190.94,161.369 190.908,161.385 190.876,161.404 190.845,161.427 190.829,161.441 190.829,160.241 190.86,160.266 190.892,160.287 190.924,160.305 190.956,160.319 190.988,160.329 191.021,160.337 191.054,160.343 191.088,160.346 191.14,160.348 191.308,160.342
  region net 12V+: 191.389,160.34 191.389,161.34 191.194,161.334 191.123,161.334 191.071,161.337 191.037,161.341 191.004,161.348 190.972,161.357 190.94,161.369 190.908,161.385 190.876,161.404 190.845,161.427 190.829,161.441 190.829,160.241 190.86,160.266 190.892,160.287 190.924,160.305 190.956,160.319 190.988,160.329 191.021,160.337 191.054,160.343 191.088,160.346 191.14,160.348 191.308,160.342
Inner2:
  region net VREF: 227.315,171.029 227.615,171.029 227.616,171.071 227.618,171.097 227.622,171.121 227.626,171.143 227.632,171.164 227.639,171.184 227.646,171.202 227.655,171.219 227.664,171.236 227.674,171.251 227.685,171.265 227.697,171.279 227.716,171.298 227.737,171.317 227.775,171.346 227.887,171.426 227.934,171.463 227.972,171.497 228.011,171.536 228.03,171.557 226.899,171.557 226.938,171.516 226.977,171.48 227.024,171.44 227.13,171.363 227.177,171.328 227.206,171.304 227.226,171.285 227.238,171.272 227.249,171.258 227.26,171.243 227.27,171.228 227.279,171.211 227.287,171.193 227.294,171.174 227.3,171.154 227.305,171.132 227.309,171.109 227.312,171.084 227.314,171.044
  region net Q2_1: 246.385,89.921 245.885,89.921 cw(c244.947,89.921) 245.51,89.171 246.76,89.171 cw(c247.322,89.921)
  region net Q3_1: 233.935,89.871 233.435,89.871 cw(c232.497,89.871) 233.06,89.121 234.31,89.121 cw(c234.872,89.871)
  region net Q4_1: 221.46,89.846 220.96,89.846 cw(c220.022,89.846) 220.585,89.096 221.835,89.096 cw(c222.397,89.846)
  region net Q5_1: 210.129,89.626 209.422,89.626 cw(c208.114,90.934) 207.91,89.096 209.71,88.677 cw(c211.144,88.611)
  region net Q6_1: 196.61,89.871 196.11,89.871 cw(c195.172,89.871) 195.735,89.121 196.985,89.121 cw(c197.547,89.871)
  region net VREF: 198.724,164.288 198.512,164.5 198.493,164.484 198.47,164.467 198.444,164.452 198.416,164.438 198.387,164.425 198.358,164.415 198.331,164.408 198.306,164.405 198.629,164.082 198.632,164.106 198.639,164.134 198.649,164.163 198.662,164.192 198.676,164.22 198.691,164.246 198.708,164.269
Bottom Layer:
  region net VCC: 175.275,108.188 273.3,108.188 273.3,120.276 175.275,120.276
  region net GND: 175.345,93.194 254.545,93.194 254.545,100.469 175.345,100.469
  region net GND: 175.345,86.594 192.195,86.594 192.195,93.481 175.345,93.481
  region net SDA: 258.008,173.325 257.708,173.325 257.707,173.278 257.704,173.249 257.7,173.223 257.695,173.198 257.689,173.174 257.681,173.153 257.673,173.133 257.663,173.114 257.652,173.096 257.641,173.08 257.628,173.065 257.615,173.05 257.601,173.036 257.578,173.016 257.545,172.991 257.433,172.914 257.37,172.869 257.328,172.834 257.284,172.794 257.251,172.76 257.24,172.748 258.478,172.748 258.445,172.783 258.401,172.825 258.358,172.861 258.305,172.9 258.189,172.979 258.147,173.01 258.123,173.029 258.109,173.043 258.095,173.057 258.082,173.072 258.07,173.088 258.059,173.105 258.049,173.123 258.039,173.142 258.031,173.163 258.024,173.185 258.019,173.209 258.014,173.235 258.011,173.263 258.008,173.309
  region net SCL: 255.171,171.079 255.471,171.079 255.472,171.126 255.475,171.155 255.479,171.182 255.484,171.206 255.49,171.23 255.498,171.251 255.506,171.271 255.516,171.29 255.526,171.308 255.538,171.324 255.55,171.34 255.564,171.354 255.585,171.375 255.609,171.394 255.651,171.426 255.766,171.504 255.819,171.543 255.862,171.58 255.905,171.621 255.938,171.656 254.7,171.656 254.733,171.621 254.766,171.589 254.81,171.552 254.863,171.511 254.98,171.432 255.024,171.401 255.048,171.382 255.07,171.362 255.084,171.348 255.097,171.333 255.109,171.317 255.12,171.3 255.13,171.282 255.139,171.262 255.147,171.241 255.154,171.219 255.16,171.195 255.165,171.169 255.168,171.141 255.171,171.095
  region net SDA: 220.7,168.489 221,168.489 221.002,168.513 221.006,168.535 221.013,168.557 221.023,168.578 221.034,168.598 221.049,168.617 221.065,168.635 221.083,168.653 221.102,168.67 221.147,168.703 221.196,168.733 221.277,168.777 221.502,168.889 221.554,168.919 221.602,168.949 221.645,168.982 221.663,168.999 221.68,169.017 220.549,169.017 220.57,168.991 220.59,168.963 220.607,168.934 220.623,168.903 220.636,168.871 220.649,168.838 220.664,168.787 220.677,168.735 220.686,168.681 220.695,168.61 220.699,168.54
  region net SCL: 218.425,168.489 218.725,168.489 218.726,168.531 218.728,168.557 218.732,168.581 218.736,168.603 218.742,168.624 218.749,168.644 218.756,168.662 218.765,168.679 218.774,168.696 218.784,168.711 218.795,168.725 218.807,168.739 218.826,168.758 218.847,168.777 218.885,168.806 218.997,168.886 219.044,168.923 219.082,168.957 219.121,168.996 219.14,169.017 218.009,169.017 218.048,168.976 218.087,168.94 218.134,168.9 218.24,168.823 218.287,168.788 218.316,168.764 218.336,168.745 218.348,168.732 218.359,168.718 218.37,168.703 218.38,168.688 218.389,168.671 218.397,168.653 218.404,168.634 218.41,168.614 218.415,168.592 218.419,168.569 218.422,168.544 218.424,168.504
  region net FOOTSW: 228.025,155.924 228.378,156.277 228.35,156.308 228.326,156.339 228.305,156.372 228.287,156.405 228.273,156.439 228.26,156.473 228.251,156.509 228.243,156.545 228.234,156.601 228.226,156.698 228.217,156.863 227.417,156.063 227.53,156.06 227.692,156.058 227.748,156.054 227.785,156.049 227.821,156.041 227.856,156.031 227.89,156.018 227.924,156.001 227.958,155.98 227.991,155.954
  region net FOOTSW: 268.55,142.126 268.05,142.126 268.046,141.884 268.039,141.786 268.03,141.724 268.022,141.68 268.012,141.637 267.999,141.597 267.989,141.572 267.978,141.548 267.965,141.525 267.952,141.504 267.936,141.484 267.92,141.465 267.902,141.448 267.882,141.433 267.86,141.419 267.837,141.407 267.812,141.397 267.785,141.389 267.756,141.383 267.725,141.379 267.692,141.376 267.675,141.376 268.925,141.376 268.891,141.377 268.859,141.38 268.829,141.386 268.801,141.393 268.775,141.402 268.751,141.413 268.729,141.426 268.708,141.441 268.689,141.457 268.672,141.475 268.656,141.494 268.642,141.515 268.629,141.537 268.617,141.56 268.606,141.585 268.597,141.61 268.585,141.651 268.575,141.694 268.565,141.755 268.557,141.834 268.551,141.969

## Silkscreen, mask and mechanical layers (free items; w line width, h text height)
Top Silkscreen Layer:
  text "12V-" at 192.588,173.63 h0.96
  text "12V+" at 187.413,173.605 h0.96
  text "SS56" at 189.813,169.33 h0.96
  text "1uF" at 245.149,168.305 h0.96
  text "220uF" at 196.301,167.23 h0.96
  text "1uF" at 203.749,165.605 h0.96
  text "20K" at 199.124,164.53 h0.96
  text "4.7K" at 199.113,162.705 h0.96
  text "1uF" at 179.349,161.78 h0.96
  text "680uF" at 195.754,160.374 h0.96 r270
  text "100E" at 199.738,155.63 h0.96
  text "AMS1117-5V" at 175.194,152.63 h0.96
  text "BC547" at 188.951,151.305 h0.96
  text "220E" at 226.788,149.905 h0.96
  text "220E" at 189.388,149.48 h0.96
  text "220E" at 217.963,148.98 h0.96
  text "220E" at 211.538,148.704 h0.96
  text "Ext 12V" at 175.503,140.03 h0.96
  text "PC817" at 215.109,139.578 h0.96
  text "PC817" at 220.709,139.578 h0.96
  text "PC817" at 226.409,139.578 h0.96
  text "Relay" at 175.526,138.805 h0.96
  text "10K" at 256.824,138.505 h0.96
  text "Rotatory Encoder" at 242.05,137.055 h0.96
  text "SS56" at 205.544,136.32 h1.44 r90
  text "BC547" at 208.251,136.055 h0.96
  text "100E" at 228.388,133.804 h0.96
  text "5V Relay" at 188.05,127.332 h1.44
  text "AC Switch" at 175.155,126.105 h0.96
  text "Weld +Ve Lead" at 248.294,122.009 h1.91
  text "Battery +Ve Input" at 175.752,121.109 h1.91
  text "Battery -Ve Input" at 176.452,101.284 h1.91
  text "SS56" at 259.171,97.714 h0.96 r90
  text "-Ve Lead" at 258.409,94.709 h1.91
  text "20E" at 199.924,91.255 h0.96
  text "20E" at 212.249,91.155 h0.96
  text "4K" at 251.636,90.98 h0.96
  text "20E" at 225.224,90.93 h0.96
  text "20E" at 260.424,90.93 h0.96
  text "20E" at 236.324,90.705 h0.96
  text "20E" at 247.099,90.705 h0.96
Bottom Silkscreen Layer:
  text "youtube.com/c/AmateurInventor" at 259.951,152.959 h1.91
  text "FOOT_SWPD" at 271.161,151.884 h1.09 r90
  text "-" at 181.15,149.784 h0.95
  text "+" at 181.25,143.659 h0.95
  text "Foot Switch" at 271.363,130.984 h1.91
  text "5V Relay" at 196.324,130.907 h1.44
  text "Weld +Ve Lead" at 270.348,122.133 h1.91
  text "Battery +Ve Input" at 199.518,121.309 h1.91
  text "Arduino Poudell Spot Welder V 1.0 1000A" at 265.683,104.263 h2.87
  text "Battery -Ve Input" at 200.568,101.484 h1.91
  text "Weld" at 263.654,95.859 h1.91
  text "-Ve Lead" at 268.773,93.584 h1.91
Top Solder Mask Layer:
  region net "": 175.249,93.175 254.55,93.175 254.55,100.551 175.249,100.551
  region net "": 175.249,86.575 192.201,86.575 192.201,93.564 175.249,93.564
  region net "": 175.224,108.15 273.35,108.15 273.35,120.339 175.224,120.339
  region net "": 175.249,86.575 192.201,86.575 192.201,93.564 175.249,93.564
  region net "": 262.549,80.725 273.75,80.725 273.75,94.277 262.549,94.277
  lines w2.102 net "": 191.239,87.831 191.239,92.616 194.249,95.626 251.523,95.626 253.54,93.609 253.54,87.831 ; 193.82,87.821 193.82,83.401 195.895,81.326 ; 203.46,95.626 203.46,88.035 203.69,87.806 ; 206.27,87.796 206.321,87.744 206.321,81.326 ; 215.69,95.626 215.69,88.206 216.09,87.806 ; 218.645,81.326 218.67,87.796 ; 228.565,87.831 228.766,88.032 228.766,95.626 ; 231.145,87.821 231.16,82.651 ; 240.525,95.626 240.525,88.37 241.015,87.881 ; 243.595,87.871 243.669,87.797 243.669,81.326 ; 256.12,81.051 256.12,87.821
  lines w8.102 net "": 259.184,81.051 263.449,81.051 268.375,85.977 268.375,88.501 ; 194.8,81.026 259.184,81.026 194.8,81.026
Bottom Solder Mask Layer:
  region net "": 175.224,108.137 273.35,108.137 273.35,120.327 175.224,120.327
  region net "": 175.294,93.143 254.596,93.143 254.596,100.519 175.294,100.519
  region net "": 175.294,86.543 192.246,86.543 192.246,93.532 175.294,93.532
  lines w2.102 net "": 193.82,81.025 193.82,87.821 ; 203.6,94.876 203.6,87.896 203.69,87.806 ; 206.27,81.025 206.27,87.796 ; 215.75,94.151 215.75,88.146 216.09,87.806 ; 218.67,81.025 218.67,87.796 ; 228.565,87.831 228.565,93.341 229.25,94.026 ; 231.145,81.025 231.145,87.821 ; 240.5,95.026 240.5,88.395 241.014,87.881 ; 243.595,81.025 243.595,87.871 ; 252.925,96.151 253.539,95.536 253.539,87.831 ; 256.12,81.025 256.12,87.821
  lines w8.102 net "": 194.8,81.025 259.185,81.025 ; 259.184,81.051 263.449,81.051 268.375,85.977 268.375,88.501

## Text inside footprints (layer, text, board x,y; h text height)
J2: Top Silkscreen Layer "1" at 173.447,130.794 h0.72 r270
J3: Top Silkscreen Layer "1" at 173.447,144.294 h0.72 r270
OLED1: Top Silkscreen Layer "IIC-Connector" at 248.125,161.873 h1.15; Top Silkscreen Layer "0.96'OLED" at 249.938,164.121 h1.15
U1: Top Silkscreen Layer "+" at 201.725,149.037 h1.42
U2: Top Silkscreen Layer "VCC" at 237.943,136.026 h0.96 r180; Top Silkscreen Layer "GND" at 238.063,138.566 h0.96 r180; Top Silkscreen Layer "DAT" at 237.854,130.946 h0.96 r180; Top Silkscreen Layer "SW" at 237.85,133.486 h0.96 r180; Top Silkscreen Layer "CLK" at 237.971,128.406 h0.96 r180
U8: Top Silkscreen Layer "RST" at 214.837,158.695 h0.97 r90; Top Silkscreen Layer "GND" at 217.377,158.695 h0.97 r90; Top Silkscreen Layer "D2" at 219.917,158.706 h0.97 r90; Top Silkscreen Layer "RX" at 212.297,158.706 h0.97 r90; Top Silkscreen Layer "TX" at 209.757,158.706 h0.97 r90; Top Silkscreen Layer "DTR   TX      RX    VCC  GND  GND  BLK" at 206.392,155.165 h0.58 r90; Top Silkscreen Layer "D4" at 224.997,158.706 h0.97 r90; Top Silkscreen Layer "D5" at 227.537,158.706 h0.97 r90; Top Silkscreen Layer "D6" at 230.077,158.706 h0.97 r90; Top Silkscreen Layer "D7" at 232.617,158.706 h0.97 r90; Top Silkscreen Layer "D8" at 235.157,158.706 h0.97 r90; Top Silkscreen Layer "D9" at 237.697,158.706 h0.97 r90; Top Silkscreen Layer "D10" at 240.237,171.395 h0.97 r90; Top Silkscreen Layer "D11" at 235.157,167.585 h0.97 r90; Top Silkscreen Layer "D12" at 232.617,167.585 h0.97 r90; Top Silkscreen Layer "D13" at 230.077,167.585 h0.97 r90; Top Silkscreen Layer "A0" at 227.537,167.596 h0.97 r90; Top Silkscreen Layer "A1" at 224.997,167.596 h0.97 r90; Top Silkscreen Layer "A2" at 221.299,170.139 h0.78 r90; Top Silkscreen Layer "A3" at 218.759,170.139 h0.78 r90; Top Silkscreen Layer "VCC" at 216.219,168.86 h0.78 r90; Top Silkscreen Layer "RST" at 214.837,166.315 h0.97 r90; Top Silkscreen Layer "GND" at 212.297,166.315 h0.97 r90; Top Silkscreen Layer "RAW" at 209.757,166.315 h0.97 r90; Top Silkscreen Layer "D3" at 222.457,158.706 h0.97 r90; Top Silkscreen Layer "A6" at 240.349,166.329 h0.78 r90; Top Silkscreen Layer "A7" at 240.237,168.866 h0.97 r90; Top Silkscreen Layer "A5" at 219.917,166.326 h0.97 r90; Top Silkscreen Layer "A4" at 222.457,166.326 h0.97 r90